# Altium PCB 2019_SCANNER_VL53.PCBDOC
Units mil, origin at the board's own origin, x right, y up, seen from the top; angles counter-clockwise.
Board outline 3860 x 1220 mil, 4 copper layers (1-TOP, 2-GND, 3-SIGNAL, 4-BOTTOM); 39 components, 34 nets, 163 pads, 55 vias.
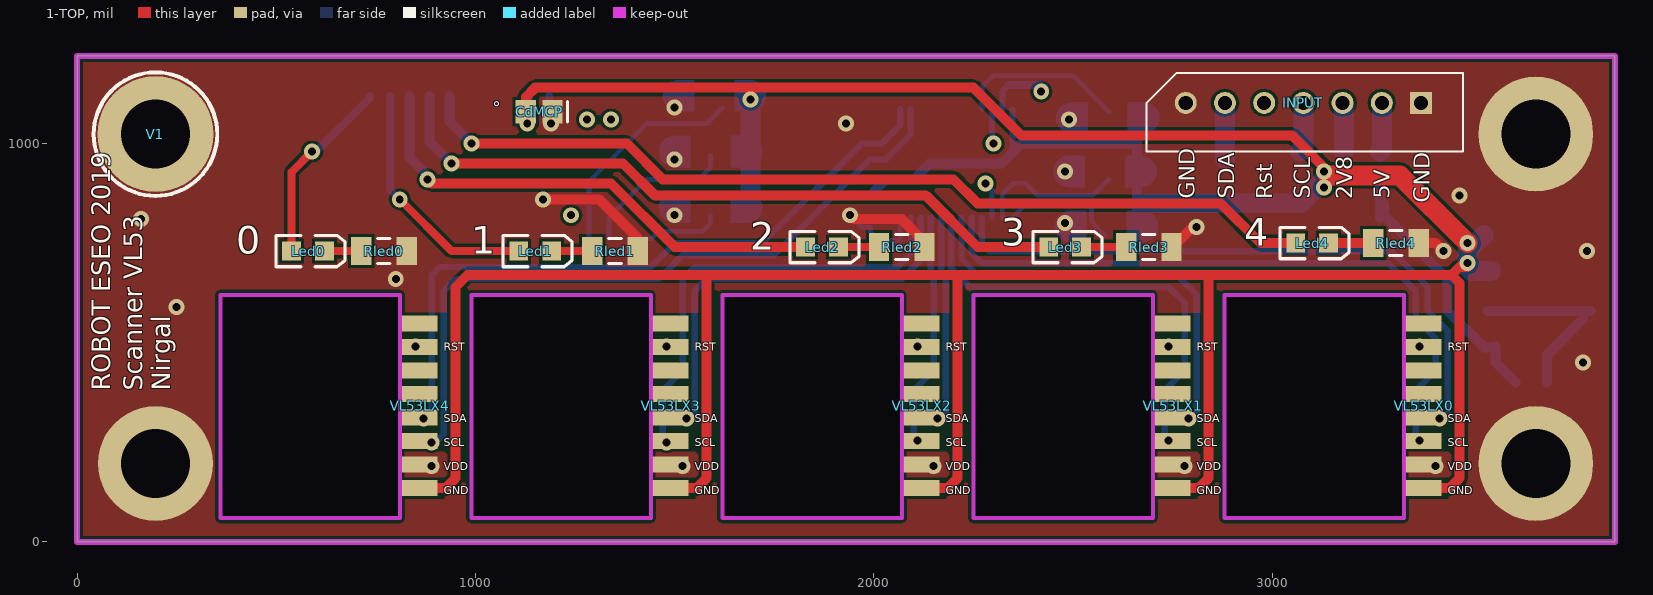
[diagram p0: 1-TOP view]
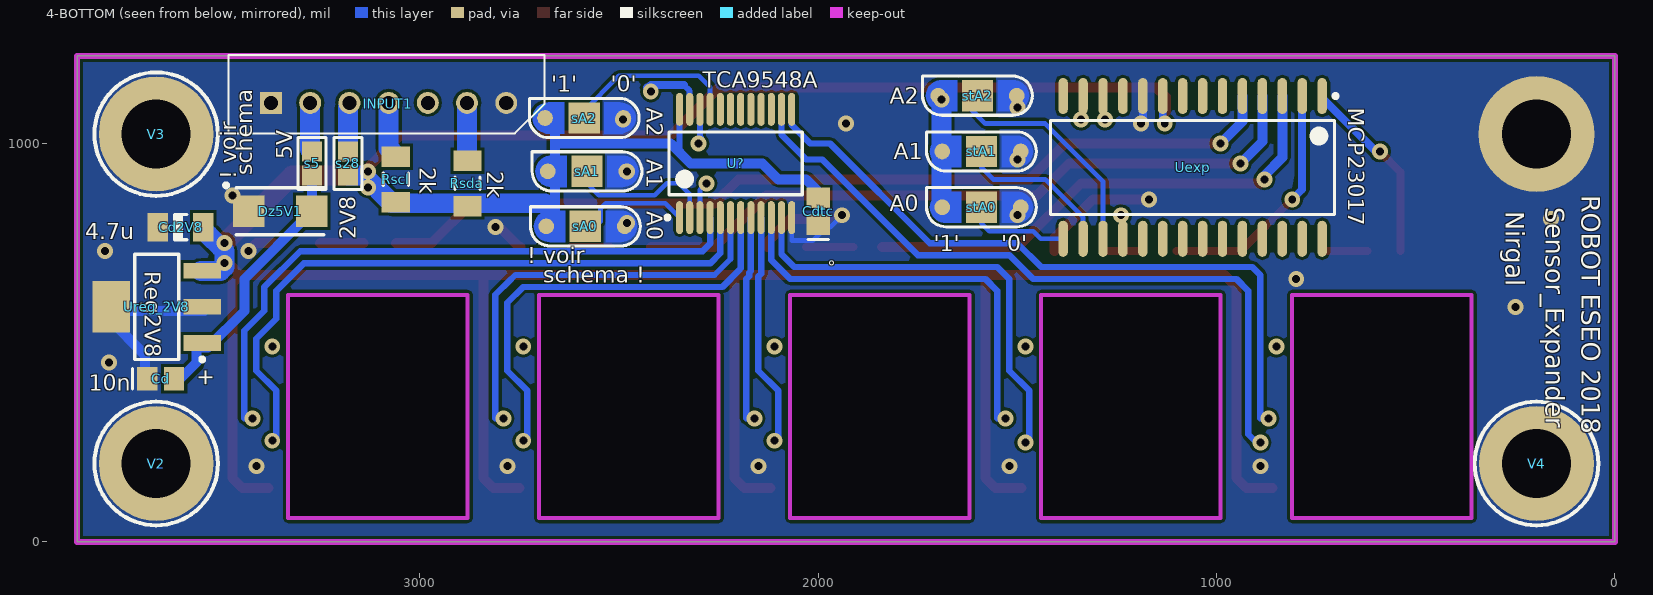
[diagram p1: 4-BOTTOM view, seen from below]
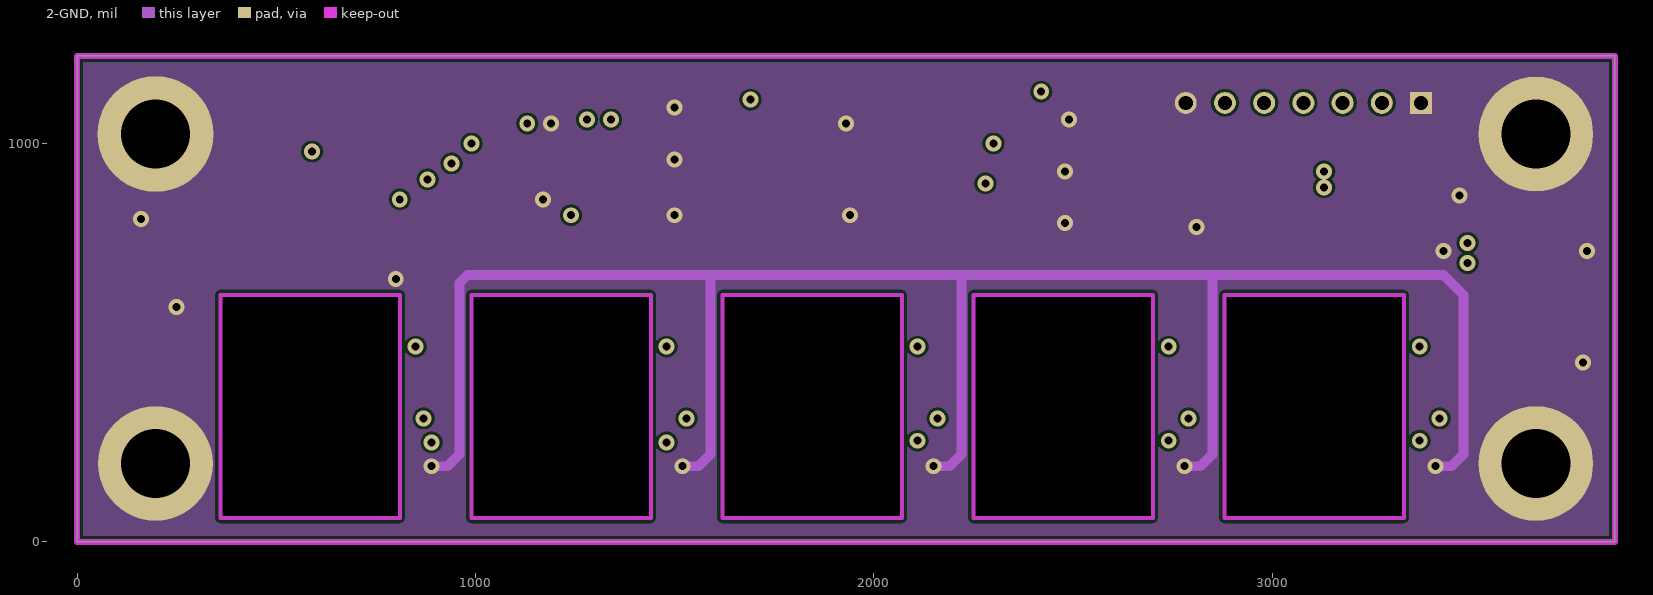
[diagram p2: 2-GND]
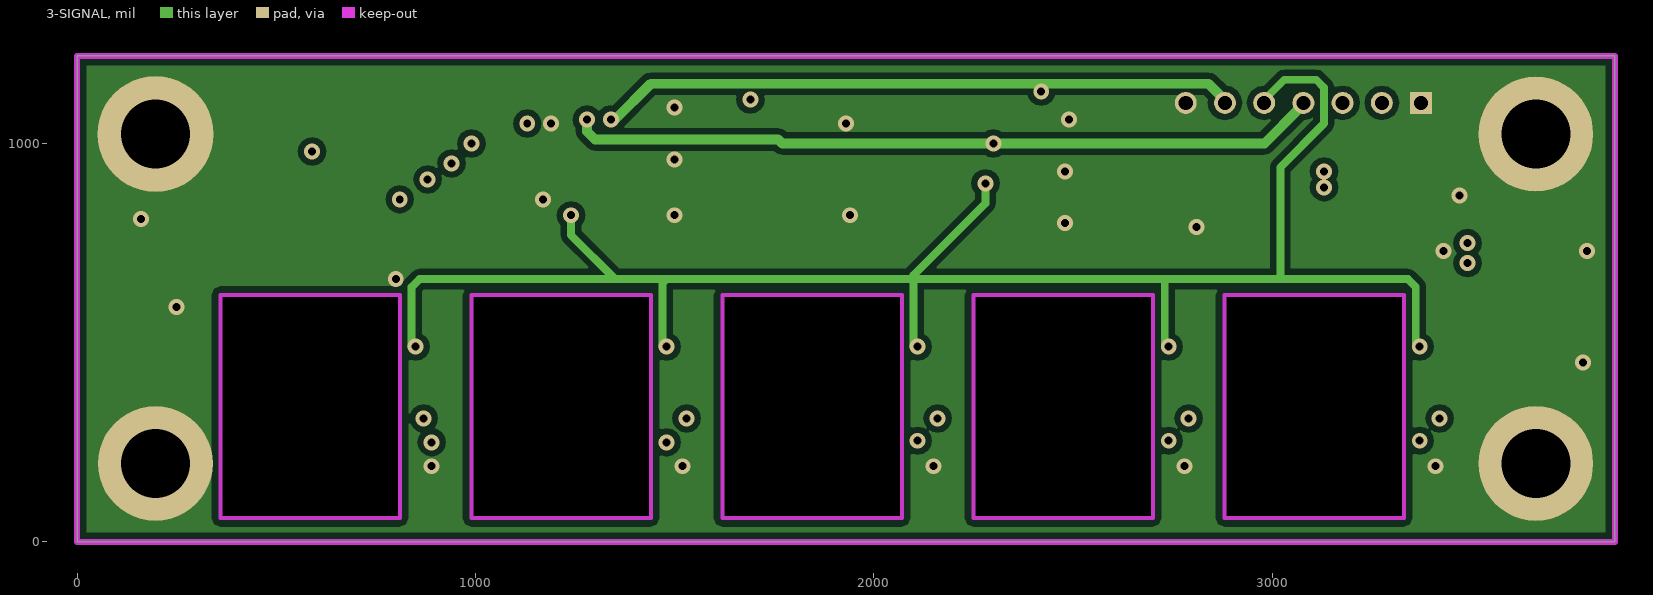
[diagram p3: 3-SIGNAL]
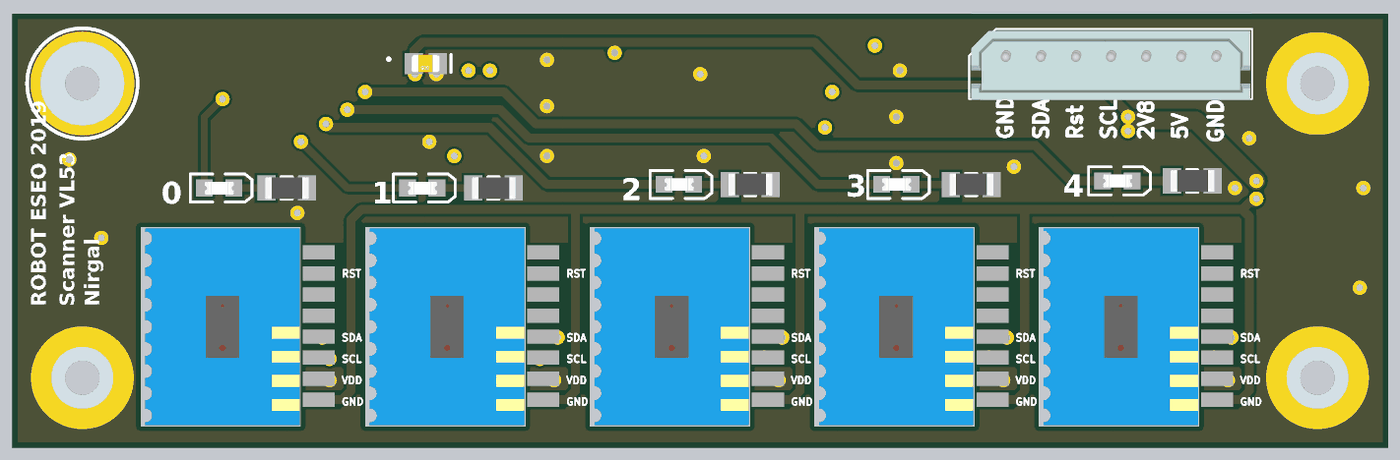
[diagram p4: 3D render of the assembled board from above, using the file's embedded part models]

## Layer stack, top to bottom
Top Solder: solder mask 0.4, Solder Resist, Dk 3.5
1-TOP: signal copper 1.4
Dielectric1: prepreg 12.6, FR-4, Dk 4.8
2-GND: signal copper 1.4
Dielectric2: core 12.6, FR-4, Dk 4.8
3-SIGNAL: signal copper 1.4
Dielectric3: prepreg 12.6, FR-4, Dk 4.8
4-BOTTOM: signal copper 1.4
Bottom Solder: solder mask 0.4, Solder Resist, Dk 3.5

## Board outline
0,0 0,1220 3860,1220 3860,0
cut-out: 360,620 810,620 810,60 360,60
cut-out: 990,620 1440,620 1440,60 990,60
cut-out: 1620,620 2070,620 2070,60 1620,60
cut-out: 2250,620 2700,620 2700,60 2250,60
cut-out: 2880,620 3330,620 3330,60 2880,60

## Design rules (kind name [scope] priority, off if disabled: settings)
Clearance Clearance_1 [InNamedPolygon('4-BOTTOM') Or  InNamedPolygon('2-SIGNAL') Or  InNamedPolygon('2-24V') Or  InNamedPolygon('3-TOP') Or  InNamedPolygon('3-GND')] p1: gap=15
Clearance [All] p2: gap=7
FabricationTestPointUsage TestPointUsage [All] p1: valid=0 allowmultiple=FALSE
FabricationTestpoint Testpoint [All] p1: side=3 testpointundercomponent=TRUE minsize=40 maxsize=100 preferedsize=60 minholesize=0 maxholesize=40 preferedholesize=32 testpointgrid=1 allowsidetop=TRUE allowsidebottom=TRUE usegrid=TRUE gridtolerance=0.01
PlaneClearance [All] p1: clearance=10
PlaneConnect [All] p1: planeconnectstyle=Direct reliefexpansion=25 reliefentries=4 reliefconductorwidth=12 reliefairgap=15
PolygonConnect [All] p1: connectstyle=Direct reliefconductorwidth=10 reliefentries=4 polygonreliefangle="90 Angle" airgapwidth=10
RoomDefinition 2019_SCANNER_VL53 [InComponentClass('2019_SCANNER_VL53')] p1: confinementstyle=ConfineIn formatcopy=TRUE lockcomponents=FALSE outline -1330,-1580 -1330,-1960 -970,-1960 -970,-1580
RoutingLayers RoutingLayers_1 [All] p1: top layer_v5=TRUE mid layer 1_v5=FALSE mid layer 2_v5=FALSE bottom layer_v5=TRUE
RoutingLayers [All] p2: top layer_v5=TRUE mid layer 1_v5=FALSE mid layer 2_v5=FALSE bottom layer_v5=TRUE
RoutingVias [All] p1: holewidth=28 width=50 viastyle="Through Hole" minholewidth=28 minwidth=50 maxholewidth=28 maxwidth=50
SilkToSolderMaskClearance SilkscreenOverComponentPads [IsPad] p1: minsilkscreentomaskgap=10 clearancetoexposedcopper=TRUE
SolderMaskExpansion [All] p1: expansion=0
Width [All] p1: maxlimit=300 minlimit=5 preferedwidth=20
23 further rules are at their usual default settings.

## Components (designator, comment, footprint, x,y, rotation, side; value= is the part's Value field where it differs from the comment)
Cd "10nF" C0805_N 3650,410 r180 bottom
Cd2V8 "4.7u" C1206_N 3600,790 r180 bottom
CdMCP "100nF" C0805_N 1160,1080 r180 top
Cdtc "100nF" C0805_N 2000,830 r90 bottom
Dz5V1 "Diode Zener" "SMA Diode" 3350,830 r180 bottom
INPUT "BARRETTE7" MOLEX7_2.50MM#1 3078,1102 r0 top
INPUT1 "BARRETTE7" MOLEX7_2.50MM#2 3080,1100 r0 bottom (schematic designator INPUT)
Led0 "LED" LED_0805 580,730 r0 top
Led1 "LED" LED_0805 1150,730 r0 top
Led2 "LED" LED_0805 1870,740 r0 top
Led3 "LED" LED_0805 2480,740 r0 top
Led4 "LED" LED_0805 3100,750 r0 top
Rled0 "150" R1206_N 770,730 r0 top
Rled1 "150" R1206_N 1350,730 r0 top
Rled2 "150" R1206_N 2070,740 r0 top
Rled3 "150" R1206_N 2690,740 r0 top
Rled4 "150" R1206_N 3310,750 r0 top
Rscl "2k" R1206_N 3060,910 r90 bottom
Rsda "2k" R1206_N 2880,900 r90 bottom
s5 "Goutte Strap_2" "Goutte Strap_2 Pads_Clearance 0.254mm" 3270,920 r90 bottom
s28 "Goutte Strap_2" "Goutte Strap_2 Pads_Clearance 0.254mm" 3180,920 r90 bottom
sA0 "Goutte Strap_3" "Goutte Strap_3 PADS" 2584,792 r180 bottom
sA1 "Goutte Strap_3" "Goutte Strap_3 PADS" 2580,930 r180 bottom
sA2 "Goutte Strap_3" "Goutte Strap_3 PADS" 2587,1064 r180 bottom
stA0 "Goutte Strap_3" "Goutte Strap_3 PADS" 1590,840 r180 bottom
stA1 "Goutte Strap_3" "Goutte Strap_3 PADS" 1590,980 r180 bottom
stA2 "Goutte Strap_3" "Goutte Strap_3 PADS" 1600,1120 r180 bottom
U? "TCA9548A" DB24_N 2207.05,950 r90 bottom
Uexp "MCP23017-E/SO" SOIC-SO28_N 1060,940 r270 bottom
Ureg_2V8 "TLV1117LV28DCYR" SOT223-4N 3660,590 r0 bottom
V1 "Entretoise WURTH CMS" ENTRETOISE_CMS#1 196.85,1023.62 r0 top
V2 "Entretoise WURTH CMS" ENTRETOISE_CMS#2 3661.42,196.85 r180 bottom
V3 "Entretoise WURTH CMS" ENTRETOISE_CMS#2 3661.42,1023.62 r180 bottom
V4 "Entretoise WURTH CMS" ENTRETOISE_CMS#2 196.85,196.85 r180 bottom
VL53LX0 "VL53LX" VL53LX 3109.68,340 r0 top
VL53LX1 "VL53LX" VL53LX 2479.76,340 r0 top
VL53LX2 "VL53LX" VL53LX 1849.84,340 r0 top
VL53LX3 "VL53LX" VL53LX 1219.92,340 r0 top
VL53LX4 "VL53LX" VL53LX 590,340 r0 top

## Footprints (in the part's own frame and the unit in brackets; to place one, negate y for a bottom-side part, rotate by r counter-clockwise, add the part's x,y. Pads: shape width x height; smd on the part's side, far side on the other; paste and mask are expansions set on the pad)
C0805_N [mm] "Chip Capacitor, Body 2.0x1.3mm, IPC Medium Density"
  rect 1.3x1.5 smd: 1(-0.85,0) 2(0.85,0)
  silkscreen extent -1.8,-0.65 -1.8,0.65, body extent -0.99,-0.63 1.01,0.63, height 0.8
C1206_N [mm] "Chip Capacitor, Body 3.2x1.6mm, IPC Medium Density"
  rect 1.3x1.8 smd: 1(-1.45,0) 2(1.45,0)
  silkscreen extent -0.4,-0.8 0.4,0.8, body extent -1.57,-0.81 1.63,0.79, height 1.02
DB24_N [mm] "SOP, 24-Leads, Body 8.2x5.3mm, Pitch 0.65mm, IPC Medium Density"
  oval 2.1x0.45 smd: 1(-3.45,3.575) 2(-3.45,2.925) 3(-3.45,2.275) 4(-3.45,1.625) 5(-3.45,0.975) 6(-3.45,0.325) 7(-3.45,-0.325) 8(-3.45,-0.975) 9(-3.45,-1.625) 10(-3.45,-2.275) 11(-3.45,-2.925) 12(-3.45,-3.575) 13(3.45,-3.575) 14(3.45,-2.925) 15(3.45,-2.275) 16(3.45,-1.625) 17(3.45,-0.975) 18(3.45,-0.325) 19(3.45,0.325) 20(3.45,0.975) 21(3.45,1.625) 22(3.45,2.275) 23(3.45,2.925) 24(3.45,3.575)
  silkscreen extent -3.57,-4.25 2,4.48, body extent -2.8,-4.25 2.8,4.25, height 2
ENTRETOISE_CMS#1 [mm] "Entretoise CMS Wurth trou 4.4mm"
  round 7.4 hole 4.4: 1(0,0)
  silkscreen extent -3.94,-3.94 3.94,3.94, body extent -2.99,-3 2.99,2.98, height 3
ENTRETOISE_CMS#2 [mm] "Entretoise CMS Wurth trou 4.4mm"
  round 7.315 hole 4.4: 1(0,0)
  silkscreen extent -3.94,-3.94 3.94,3.94, body extent -2.99,-3 2.99,2.98, height 3
"Goutte Strap_2 Pads_Clearance 0.254mm" [mil] "Goutte Strap_2 Pads_Clearance 0.254mm"
  rect 50x50 smd mask+7.87: 1(0,0) 2(60,0)
  silkscreen extent -35,-35 95,35
"Goutte Strap_3 PADS" [mm] "3 Pads CMS Goutte Strap"
  round 1 smd: 1(-2.5,0) 3(2.5,0)
  rect 2x2 smd: 2(0,0)
  1-TOP region: 1.289,1 2.289,1 2.672,0.924 2.996,0.707 3.213,0.383 3.289,0 3.289,0 3.213,-0.383 2.996,-0.707 2.672,-0.924 2.289,-1 2.289,-1 1.289,-1
  1-TOP region: -1.286,-1 -2.286,-1 -2.669,-0.924 -2.993,-0.707 -3.21,-0.383 -3.286,0 -3.286,0 -3.21,0.383 -2.993,0.707 -2.669,0.924 -2.286,1 -2.286,1 -1.286,1
  silkscreen extent -3.5,-1.25 3.5,1.25
LED_0805 [mm] "SM LED; 2 Flat Leads"
  rect 1.2x1.2 smd: 1(-1.05,0) 2(1.05,0)
  silkscreen extent -2.05,-1 2.35,1, body extent -1.05,-0.64 1.06,0.64, height 1.2
MOLEX7_2.50MM#1 [mm] "7 pins, straight"
  rect 1.4x1.4 hole 0.9: 1(7.5,0)
  round 1.4 hole 0.9: 2(5,0) 3(2.5,0) 4(0,0) 5(-2.5,0) 6(-5,0) 7(-7.5,0)
  silkscreen extent -10,-3.1 10.16,1.9, body extent -9.85,-3.15 10.05,1.75, height 5.95
MOLEX7_2.50MM#2 [mm] "7 pins, straight"
  silkscreen extent -10,-3.1 10.16,1.9, body extent -9.85,-3.15 10.05,1.75, height 5.95
R1206_N [mm] "Chip Resistor, Body 3.2x1.6mm, IPC Medium Density"
  rect 1.3x1.8 smd: 1(-1.45,0) 2(1.45,0)
  silkscreen extent -0.4,-0.8 0.4,0.8, body extent -1.68,-0.87 1.68,0.87, height 0.71
"SMA Diode" [mm] "Case 403D-02"
  rect 2x2 smd: 1(-2,0) 2(2,0)
  silkscreen extent -3.58,-1.5 2.8,1.77, body extent -2.8,-1.46 2.79,1.46, height 2.41
SOIC-SO28_N [mm] "SOIC, 28-Leads, Body 17.9x7.5mm, Pitch 1.27mm, IPC Medium Density"
  oval 2.3x0.6 smd: 1(-4.55,8.255) 2(-4.55,6.985) 3(-4.55,5.715) 4(-4.55,4.445) 5(-4.55,3.175) 6(-4.55,1.905) 7(-4.55,0.635) 8(-4.55,-0.635) 9(-4.55,-1.905) 10(-4.55,-3.175) 11(-4.55,-4.445) 12(-4.55,-5.715) 13(-4.55,-6.985) 14(-4.55,-8.255) 15(4.55,-8.255) 16(4.55,-6.985) 17(4.55,-5.715) 18(4.55,-4.445) 19(4.55,-3.175) 20(4.55,-1.905) 21(4.55,-0.635) 22(4.55,0.635) 23(4.55,1.905) 24(4.55,3.175) 25(4.55,4.445) 26(4.55,5.715) 27(4.55,6.985) 28(4.55,8.255)
  silkscreen extent -4.67,-9.05 3,9.23, body extent -3.8,-9.05 3.8,9.05, height 2.65
SOT223-4N [mm] "SOT223/SC73, 4-Leads, Body 6.5x3.5mm, Pitch 2.3mm, Lead Span 7mm, IPC Medium Density"
  rect 2.4x1 smd: 1(-2.9,2.3) 2(-2.9,0) 3(-2.9,-2.3)
  rect 2.4x3.3 smd: 4(2.9,0)
  silkscreen extent -3.02,-3.35 1.4,3.47, body extent -3.39,-3.35 3.5,3.35, height 1.8
VL53LX [mil]
  rect 90x40 smd: 1(270,-204.72) 2(270,-145.67) 3(270,-86.61) 4(270,-27.56) 5(270,31.5) 6(270,90.55) 7(270,149.61) 8(270,208.66)
  body extent -217,-276 217,276, height 42

## Part data
Cd CdMCP Cdtc: library part Condensateur, "Capacitor"
Cd2V8: library part Capacitor, "Capacitor"
Dz5V1: "Zener Diode"
INPUT INPUT1: "Header, 6-Pin"
Led0 Led1 Led2 Led3 Led4: "Typical LED"
Rled0 Rled1 Rled2 Rled3 Rled4 Rscl Rsda: library part Resistor, "Resistor"
U?: library part PCA9548ADB, "8-Channel I2C Switch with Reset, 2.3 to 5.5 V, -40 to 85 degC, 24-pin SSOP (DB), Green (RoHS & no Sb/Br)"
Uexp: "16-Bit I/O Expander with Serial Interface, 28-Pin SOIC, Extended Temperature"
Ureg_2V8: library part MCP1826S-3302E/DB, "1000 mA, Low Voltage, Low Quiescent Current LDO Regulator, 3-Pin SOT-223, Extended Temperature"
V1 V2 V3 V4: "Entretoise Wurth"

## Via types
v1: diameter 40, hole 20, 1-TOP to 4-BOTTOM, 55 vias

## Nets (pads, with @x,y where several pads share a name; then routed paths per layer and width w, separated by ;. In a path a pad name is that pad's centre, name@x,y a point inside that pad or via, vN(x,y) a via of type N, cw(c..) or ccw(c..) an arc to the next point about the centre after c; other vN are vias at no path point)
2V8: Cd2V8.2 CdMCP.2 Cdtc.2 Rscl.1 Rsda.1 s28.1 sA0.1 sA1.1 sA2.1 stA0.1 stA1.1 stA2.1 U?.24 Uexp.9 Ureg_2V8.3 VL53LX0.1 VL53LX1.1 VL53LX2.1 VL53LX3.1 VL53LX4.1 | length 10298
  1-TOP w25: VL53LX4.1 925.28,135.28 950,160 950,640 980,670 1580,670 ; CdMCP.2 1126.54,1116.54 1150,1140 1690,1140 ; VL53LX3.1@1490,135.28 1555.28,135.28 1580,160 1580,670 ; v1(1690,1110) 1690,1140 ; VL53LX2.1@2120,135.28 2185.28,135.28 2210,160 2210,670 ; VL53LX1.1@2750,135.28 2815.28,135.28 2840,160 2840,670 ; 3160,910 3150,920 3050,1020 2370,1020 2250,1140 1690,1140 ; VL53LX0.1@3380,135.28 3445.28,135.28 3470,160 3470,650 3450,670 ; v1@3490,690 3470,690 3450,670 ; 1580,670 2210,670 ; 2210,670 2840,670 ; 2840,670 3450,670
  1-TOP w50: v1@3140,920 3150,920 3320,920 v1(3490,750)
  4-BOTTOM w15: 2347.8,982.2 U?.24
  4-BOTTOM w20: v1(1130,1050) 1135,1055 Uexp.9
  4-BOTTOM w25: Cdtc.2@2000,880 2030,910 2100,910 2140,950 2320,950 2370,1000 2660,1000 ; 2660,790 2660,1000 ; 2660,1050 2660,1000
  4-BOTTOM w50: stA0.1@1690,840 v1(1690,1110) ; 2686.09,850 3070,850 3140,920 s28.1 ; 3490,730 v1(3490,700) 3490,690 3500,680 Ureg_2V8.3@3548.38,680 ; v1@3500,740 Cd2V8.2@3530,770
  other v1: 3130,890 3130,930
5V: Cd.2 Dz5V1.2 s5.1 Ureg_2V8.1 | length 720.7
  4-BOTTOM w25: Dz5V1.2@3270,813 s5.1@3270,930 ; Dz5V1.2@3280,850 3280,820 3440,660 3440,580 3531.55,488.45 Ureg_2V8.1@3558.83,488.45 ; Ureg_2V8.1@3560,490 3560,450 Cd.2@3610,400
GND: Cd2V8.1 Cd.1 CdMCP.1 Cdtc.1 Dz5V1.1 INPUT.1 INPUT.7 Rled0.2 Rled1.2 Rled2.2 Rled3.2 Rled4.2 sA0.3 sA1.3 sA2.3 stA0.3 stA1.3 stA2.3 U?.12 Uexp.10 Ureg_2V8.2 Ureg_2V8.4 V1.1 V2.1 V3.1 V4.1 VL53LX0.2 VL53LX1.2 VL53LX2.2 VL53LX3.2 VL53LX4.2 | length 6494.7
  1-TOP w25: v1@1180,860 1310,860 1407.09,762.91 Rled1.2 ; v1@1950,810 2070,810 2127.09,752.91 Rled2.2 ; Rled3.2 2750,740 v1@2800,790 ; Rled4.2 3410,750 v1(3430,730)
  2-GND w25: v1@900,190 930,190 960,220 960,650 980,670 1590,670 ; v1@1530,190 1560,190 1590,220 1590,670 ; v1@2160,190 2190,190 2220,220 2220,670 ; v1@2790,190 2820,190 2850,220 2850,670 ; v1@3420,190 3450,190 3480,220 3480,620 3430,670 2850,670 ; 1590,670 2220,670 ; 2220,670 2850,670
  4-BOTTOM w12: v1(1940,820) 1970,790 1990,790 1990,780 2013.7,756.3 2066.3,756.3 U?.12
  4-BOTTOM w20: Uexp.10 1185,1055 v1(1190,1050)
  4-BOTTOM w25: Ureg_2V8.2@3540,580 Ureg_2V8.4@3800,580 ; Cd.1@3690,400 3690,470 Ureg_2V8.4@3780,560
  other v1: 890,190 1520,190 2150,190 2780,190 3410,190 3780,450 250,590 800,660 3790,730 2810,790 2480,800 160,810 1500,820 1170,860 3470,870 2480,930 1500,960 1930,1050 2490,1060 1500,1090
I2C_SCL: INPUT.4 Rscl.2 U?.22 Uexp.12 | length 2072.2
  3-SIGNAL w25: v1(1280,1060) 1280,1030 1300,1010 1760,1010 1770,1000 2980,1000 INPUT.4@3070,1090
  4-BOTTOM w15: v1@2296.61,1013.39 U?.22
  4-BOTTOM w20: v1@2296.61,1013.39 v1@2300,1010
  4-BOTTOM w50: Rscl.2@3070,980 3078,988 INPUT.4
  other v1: 2300,1000
I2C_SDA: INPUT.6 Rsda.2 U?.23 Uexp.13 | length 1895.8
  3-SIGNAL w25: v1@1350,1060 1440,1150 2840,1150 2880,1110 2880,1100.85 INPUT.6
  4-BOTTOM w15: U?.23 2322.2,1132.2 2337,1147
  4-BOTTOM w20: 2337,1147 2420,1147 2427,1140 v1@2430,1140
  4-BOTTOM w50: Rsda.2@2881,961 INPUT.6@2881,1099
  other v1: 1340,1060 2420,1130
LED0: Led0.1 Uexp.1 | length 466.3
  1-TOP w20: Led0.1 538.66,928.66 v1(590,980)
  4-BOTTOM w20: v1@600,980 735,1115 Uexp.1
LED1: Led1.1 Uexp.2 | length 613.3
  1-TOP w20: v1(810,860) 940,730 Led1.1@1100,730
  4-BOTTOM w20: Uexp.2 785,885 v1(810,860)
LED2: Led2.1 Uexp.3 | length 1248.2
  1-TOP w25: v1(880,910) 890,900 1340,900 1500,740 Led2.1@1840,740
  4-BOTTOM w25: Uexp.3 835,965 v1@880,920
LED3: Led3.1 Uexp.4 | length 1758.9
  1-TOP w25: v1(940,950) 1370,950 1450,870 2130,870 2260,740 Led3.1@2420,740
  4-BOTTOM w25: Uexp.4 885,1005 v1(940,950)
LED4: Led4.1 Uexp.5 | length 2315.5
  1-TOP w25: v1(990,1000) 1380,1000 1470,910 2200,910 2260,850 2870,850 2970,750 Led4.1@3060,750
  4-BOTTOM w25: Uexp.5 935,1055 v1(990,1000)
NetINPUT_2: INPUT.2 s5.2 | length 124
  4-BOTTOM w50: s5.2 3274.85,984.85 INPUT.2
NetINPUT_3: INPUT.3 s28.2 | length 110
  4-BOTTOM w50: s28.2 INPUT.3@3180,1090
NetLed0_2: Led0.2 Rled0.1 | length 98.7
  1-TOP w20: Led0.2 Rled0.1@720,730
NetLed1_2: Led1.2 Rled1.1 | length 88.7
  1-TOP w20: Led1.2 Rled1.1@1280,730
NetLed2_2: Led2.2 Rled2.1 | length 118.7
  1-TOP w20: Led2.2 Rled2.1@2030,740
NetLed3_2: Led3.2 Rled3.1 | length 98.7
  1-TOP w20: Led3.2 Rled3.1@2620,740
NetLed4_2: Led4.2 Rled4.1 | length 108.7
  1-TOP w25: Led4.2 Rled4.1@3250,750
NetsA0_2: sA0.2 U?.1 | length 299.5
  4-BOTTOM w12: U?.1 2383.62,850 2533.01,850 2546.25,836.75 2546.25,803.75 sA0.2@2580,770
NetsA1_2: sA1.2 U?.2 | length 366.3
  4-BOTTOM w12: U?.2 2322.2,872.2 2350,900 2380,900 2410,870 2550,870 sA1.2@2590,910
NetsA2_2: sA2.2 U?.21 | length 423.5
  4-BOTTOM w12: U?.21 2271.02,1141.02 2300,1170 2500,1170 sA2.2@2590,1080
NetstA0_2: stA0.2 Uexp.15 | length 241.2
  4-BOTTOM w12: Uexp.15 1440.87,760.87 1460,780 1570,780 1590,800 stA0.2@1590,820
NetstA1_2: stA1.2 Uexp.16 | length 390.9
  4-BOTTOM w12: Uexp.16 1335,815 1430,910 1560,910 1590,940 stA1.2@1590,970
NetstA2_2: stA2.2 Uexp.17 | length 555.8
  4-BOTTOM w12: Uexp.17 1285,905 1430,1050 1580,1050 stA2.2@1620,1090
RESET: INPUT.5 U?.3 Uexp.18 VL53LX0.7 VL53LX1.7 VL53LX2.7 VL53LX3.7 VL53LX4.7 | length 4658.1
  3-SIGNAL w20: v1@840,490 840,640 860,660 1350,660 ; v1@1240,810 1240,770 1350,660 ; v1@1470,490 1470,650 1480,660 ; v1@2100,490 2100,660 ; v1(2280,900) 2280,850 2100,670 2100,660 ; v1@2730,490 2730,660 ; INPUT.5@2980,1110 3030,1160 3110,1160 3130,1140 3130,1050 3020,940 3020,660 ; v1@3360,490 3360,640 3340,660 3020,660 ; 1350,660 1480,660 ; 1480,660 2100,660 ; 2100,660 2730,660 ; 2730,660 3020,660
  4-BOTTOM w12: v1(2280,900) 2296.61,883.39 U?.3
  other v1: 850,490 1480,490 2110,490 2740,490 3370,490 1240,820
SCL0: U?.5 VL53LX0.3 | length 1664.8
  4-BOTTOM w16: U?.5 2245.43,724.57 2271,699 3291,699 3360,630 3360,560 3410,510 3410,430 3360,380 v1@3360,250
  other v1: 3370,254
SCL1: U?.7 VL53LX1.3 | length 1130.4
  4-BOTTOM w16: U?.7 2194.25,686.94 2196,685.2 2196,684 2240,640 2740,640 2780,600 2780,430 2730,380 2730,250 v1@2740,250
  other v1: 2740,254
SCL2: U?.9 VL53LX2.3 | length 587.8
  4-BOTTOM w16: v1@2100,250 2100,380 2150,430 2150,666.14 2143.07,673.07 U?.9
  other v1: 2110,254
SCL3: U?.11 VL53LX3.3 | length 1120.5
  4-BOTTOM w16: v1@1470,250 1470,380 1520,430 1520,660 1550,690 2060,690 2091.89,721.89 U?.11
  other v1: 1480,250
SCL4: U?.14 VL53LX4.3 | length 1786.4
  4-BOTTOM w16: v1@900,250 920,270 920,630 950,660 1460,660 1520,720 1750,720 1990,960 2030,960 2091.89,1021.89 U?.14
  other v1: 890,250
SDA0: U?.4 VL53LX0.4 | length 1580
  4-BOTTOM w16: U?.4 2271.02,748.98 2290,730 3300,730 3390,640 3390,580 3440,530 3440,310
  other v1: 3420,310
SDA1: U?.6 VL53LX1.4 | length 1041.5
  4-BOTTOM w15: U?.6 2219.84,710.16 2260,670 2760,670 2770,660
  4-BOTTOM w16: 2770,660 2810,620 2810,310
  other v1: 2790,310
SDA2: U?.8 VL53LX2.4 | length 508.9
  4-BOTTOM w16: U?.8 2168.66,680.01 2173,675.67 2173,667 2180,660 2180,310
  other v1: 2160,310
SDA3: U?.10 VL53LX3.4 | length 1026.3
  4-BOTTOM w16: 1550,310 1550,630 1580,660 2070,660 2117.48,707.48 U?.10
  other v1: 1530,310
SDA4: U?.13 VL53LX4.4 | length 1751.7
  4-BOTTOM w16: v1(870,310) 890,310 890,670 910,690 1440,690 1500,750 1720,750 1970,1000 2020,1000 2066.3,1046.3 U?.13
pads on no net: U?.15 U?.16 U?.17 U?.18 U?.19 U?.20 Uexp.6 Uexp.7 Uexp.8 Uexp.11 Uexp.14 Uexp.19 Uexp.20 Uexp.21 Uexp.22 Uexp.23 Uexp.24 Uexp.25 Uexp.26 Uexp.27 Uexp.28 VL53LX0.5 VL53LX0.6 VL53LX0.8 VL53LX1.5 VL53LX1.6 VL53LX1.8 VL53LX2.5 VL53LX2.6 VL53LX2.8 VL53LX3.5 VL53LX3.6 VL53LX3.8 VL53LX4.5 VL53LX4.6 VL53LX4.8

## Polygon pours and split planes (outlines as drawn)
GND on 3-SIGNAL "3-GND" (solid, pour order 5): 3870,1220 3870,0 4.81,2.47 0,1220
GND on 2-GND "2-GND" (solid, pour order 6): 3860,1220 3860,0 4.8,2.47 0,1220
GND on 1-TOP "1-GND" (solid, pour order 7): 3870,1220 3870,0 4.81,2.47 0,1220
GND on 4-BOTTOM "4-BOTTOM-GND" (solid, pour order 8): 3860,1220 3860,0 4.8,2.47 0,1220

## Keep-outs
Keep-Out Layer:
  lines w10: 360,60 360,620 810,620 810,60 360,60 ; 990,60 1440,60 1440,620 990,620 990,60 ; 1620,60 2070,60 2070,620 1620,620 1620,60 ; 2250,60 2700,60 2700,620 2250,620 2250,60 ; 2880,60 3330,60 3330,620 2880,620 2880,60
  lines w15: 0,0 0,1220 3860,1220 3860,0 0,0

## Silkscreen, mask and mechanical layers (free items; w line width, h text height)
Top Overlay:
  text "°" at 1030,1110 h30 r270
  text "GND" at 2805,861 h40 r90
  text "SDA" at 2905,861 h40 r90
  text "SCL" at 3095,861 h40 r90
  text "5V" at 3295,861 h40 r90
  text "Rst" at 3000,860 h40 r90
  text "2V8" at 3200,860 h40 r90
  text "GND" at 3395,851 h40 r90
  text "3" at 2320,720 h120
  text "4" at 2930,720 h120
  text "2" at 1690,710 h120
  text "0" at 400,700 h120
  text "1" at 990,700 h120
  text "RST" at 920,480 h20
  text "RST" at 1550,480 h20
  text "RST" at 2180,480 h20
  text "RST" at 2810,480 h20
  text "RST" at 3440,480 h20
  text "ROBOT ESEO 2019" at 100,380 h80 r90
  text "Scanner VL53" at 180,380 h80 r90
  text "Nirgal" at 250,380 h80 r90
  text "SDA" at 920,300 h20
  text "SDA" at 1550,300 h20
  text "SDA" at 2180,300 h20
  text "SDA" at 2810,300 h20
  text "SDA" at 3440,300 h20
  text "SCL" at 920,240 h20
  text "SCL" at 1550,240 h20
  text "SCL" at 2180,240 h20
  text "SCL" at 2810,240 h20
  text "SCL" at 3440,240 h20
  text "VDD" at 920,180 h20
  text "VDD" at 1550,180 h20
  text "VDD" at 2180,180 h20
  text "VDD" at 2810,180 h20
  text "VDD" at 3440,180 h20
  text "GND" at 920,120 h20
  text "GND" at 1550,120 h20
  text "GND" at 2180,120 h20
  text "GND" at 2810,120 h20
  text "GND" at 3440,120 h20
Bottom Overlay:
  text "TCA9548A" at 2290,1140 h40
  text "'0'" at 2520,1130 h40
  text "'1'" at 2670,1130 h40
  text "A2" at 1820,1100 h40
  text "MCP23017" at 670,1090 h40 r90
  text "A2" at 2430,1090 h40 r90
  text "A1" at 1810,960 h40
  text "A1" at 2430,960 h40 r90
  text "5V" at 3320,960 h40 r270
  text "2k" at 3000,940 h40 r90
  text "2k" at 2830,930 h40 r90
  text "schema" at 3420,920 h40 r270
  text "! voir" at 3460,910 h40 r270
  text "ROBOT ESEO 2018" at 100,870 h80 r90
  text "Sensor_Expander" at 190,840 h80 r90
  text "Nirgal" at 290,830 h80 r90
  text "A0" at 1820,830 h40
  text "A0" at 2430,830 h40 r90
  text "2V8" at 3160,760 h40 r270
  text "4.7u" at 3840,760 h40
  text "'0'" at 1540,730 h40
  text "'1'" at 1710,730 h40
  text "! voir" at 2730,700 h40
  text "°" at 1990,690 h30 r90
  text "Reg2V8" at 3690,680 h40 r90
  text "schema !" at 2690,650 h40
  text "+" at 3520,390 h40 r270
  text "10n" at 3830,380 h40

## Dimensions
3860,0 to 3937.01,0 on Mechanical 15